# Altium PCB MUHTAS-1.PcbDoc
Units mm, origin at the board's own origin, x right, y up, seen from the top; angles counter-clockwise.
Board outline 75 x 60 mm, 2 copper layers (Top Layer, Bottom Layer); 35 components, 26 nets, 130 pads, 17 vias.
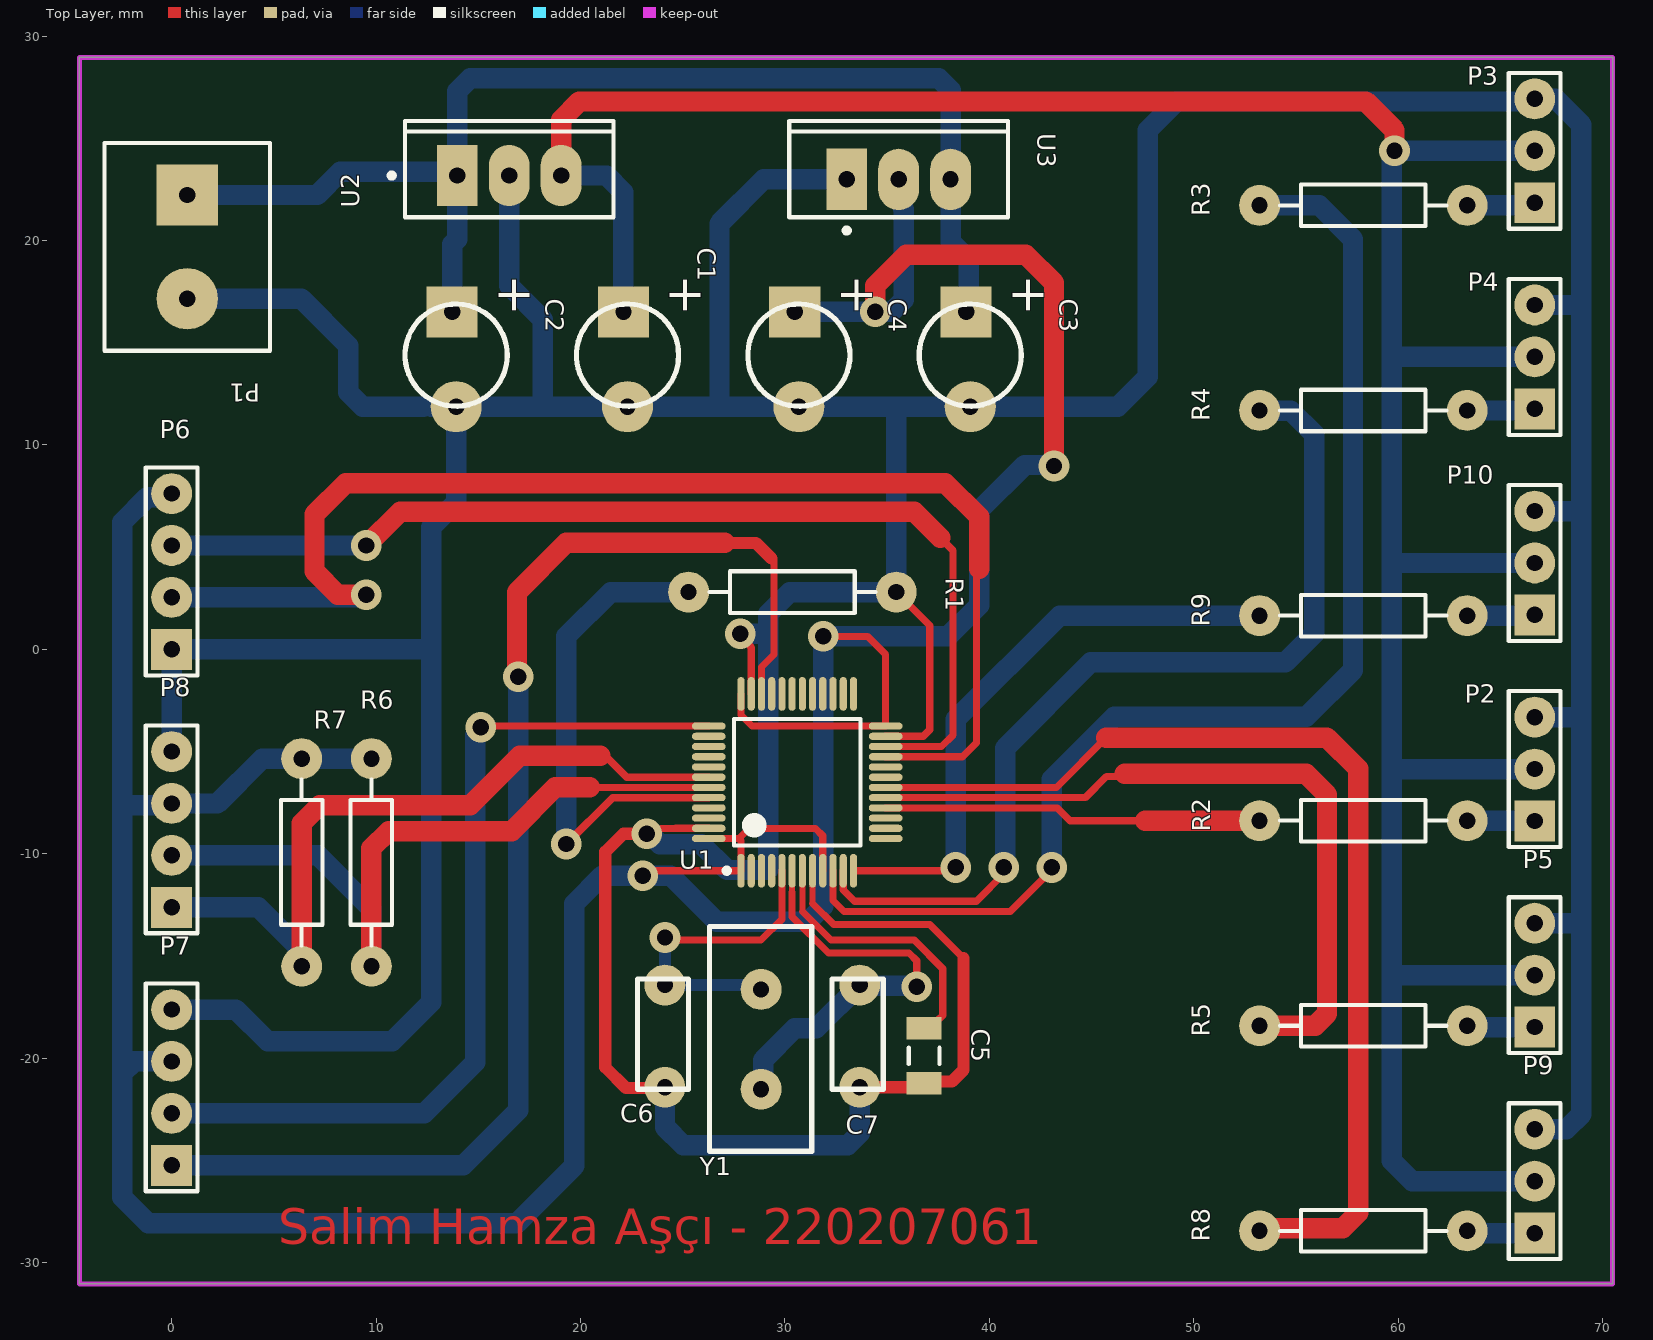
[diagram p0: Top Layer view]
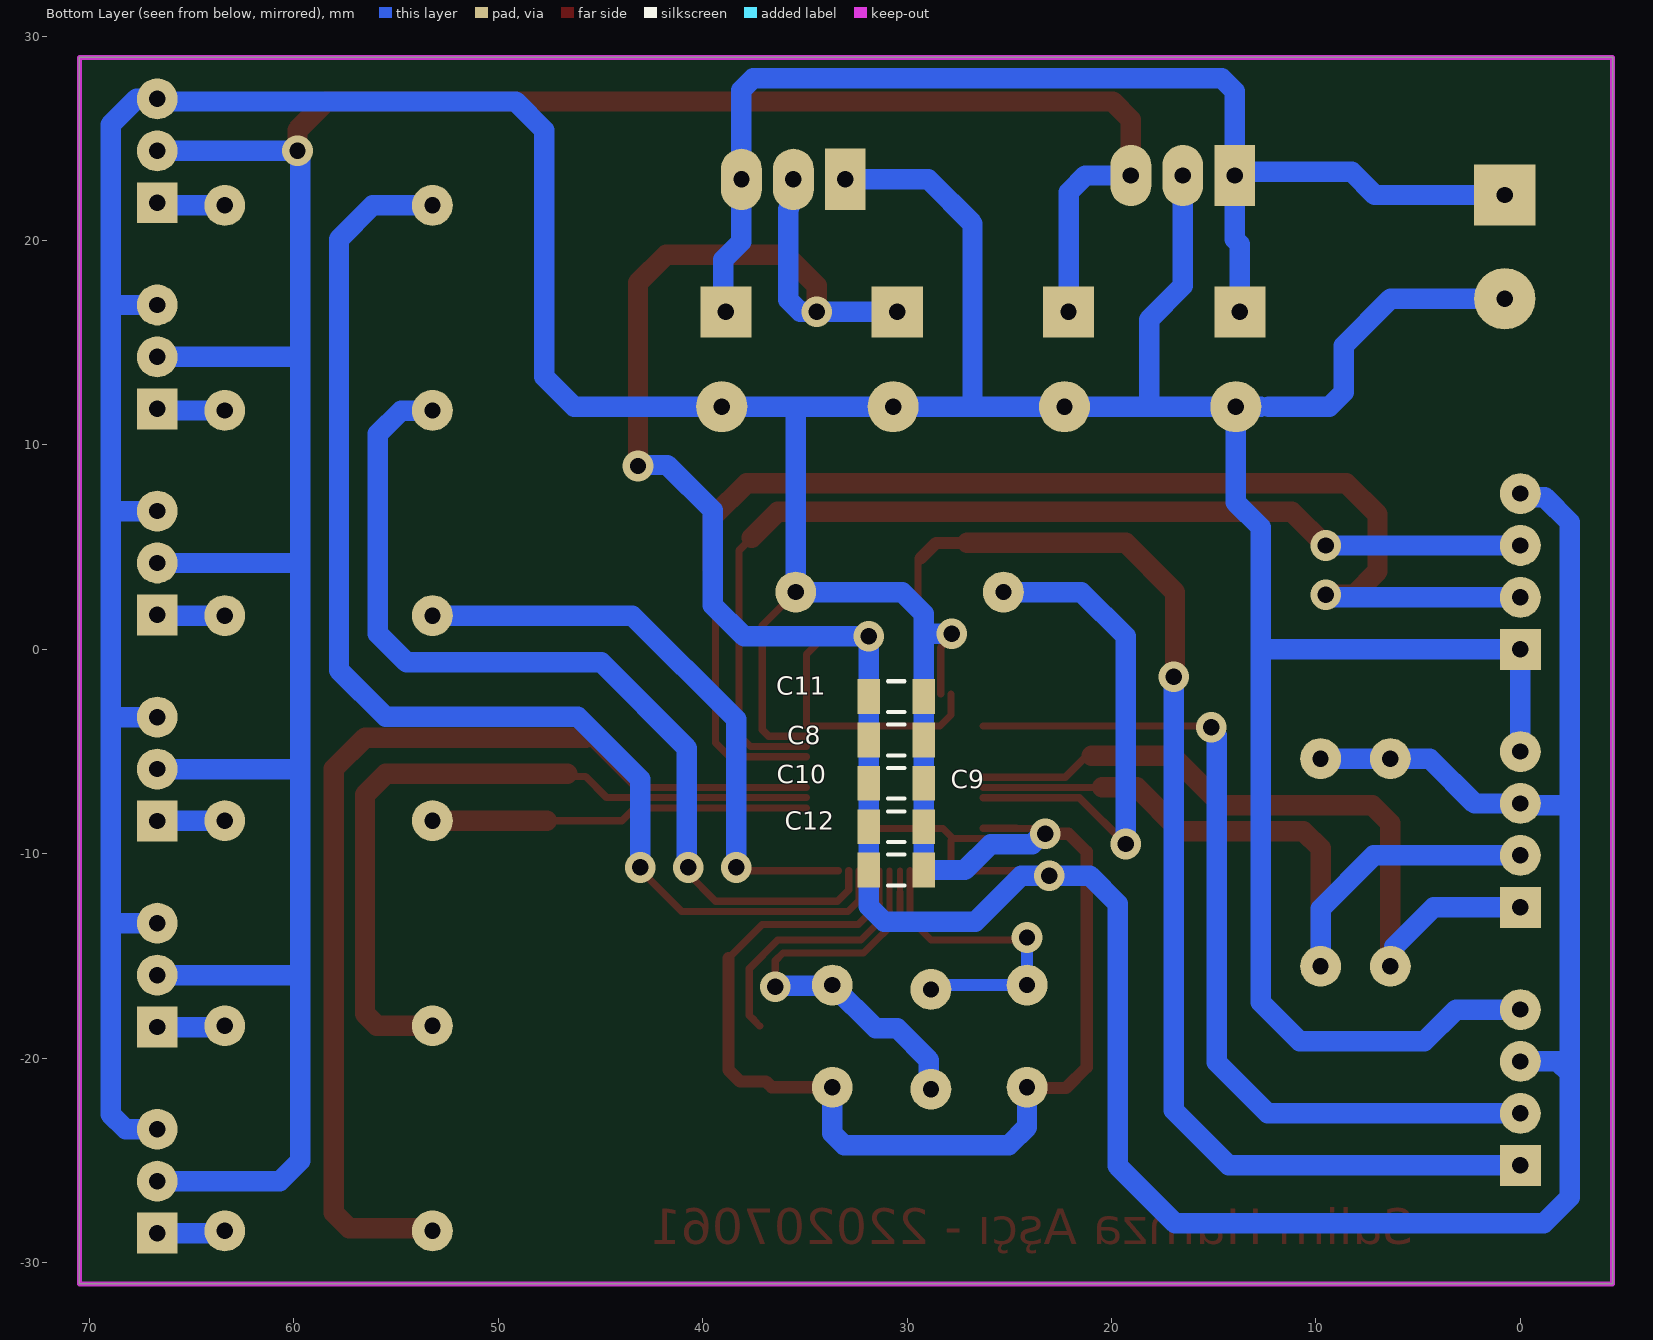
[diagram p1: Bottom Layer view, seen from below]
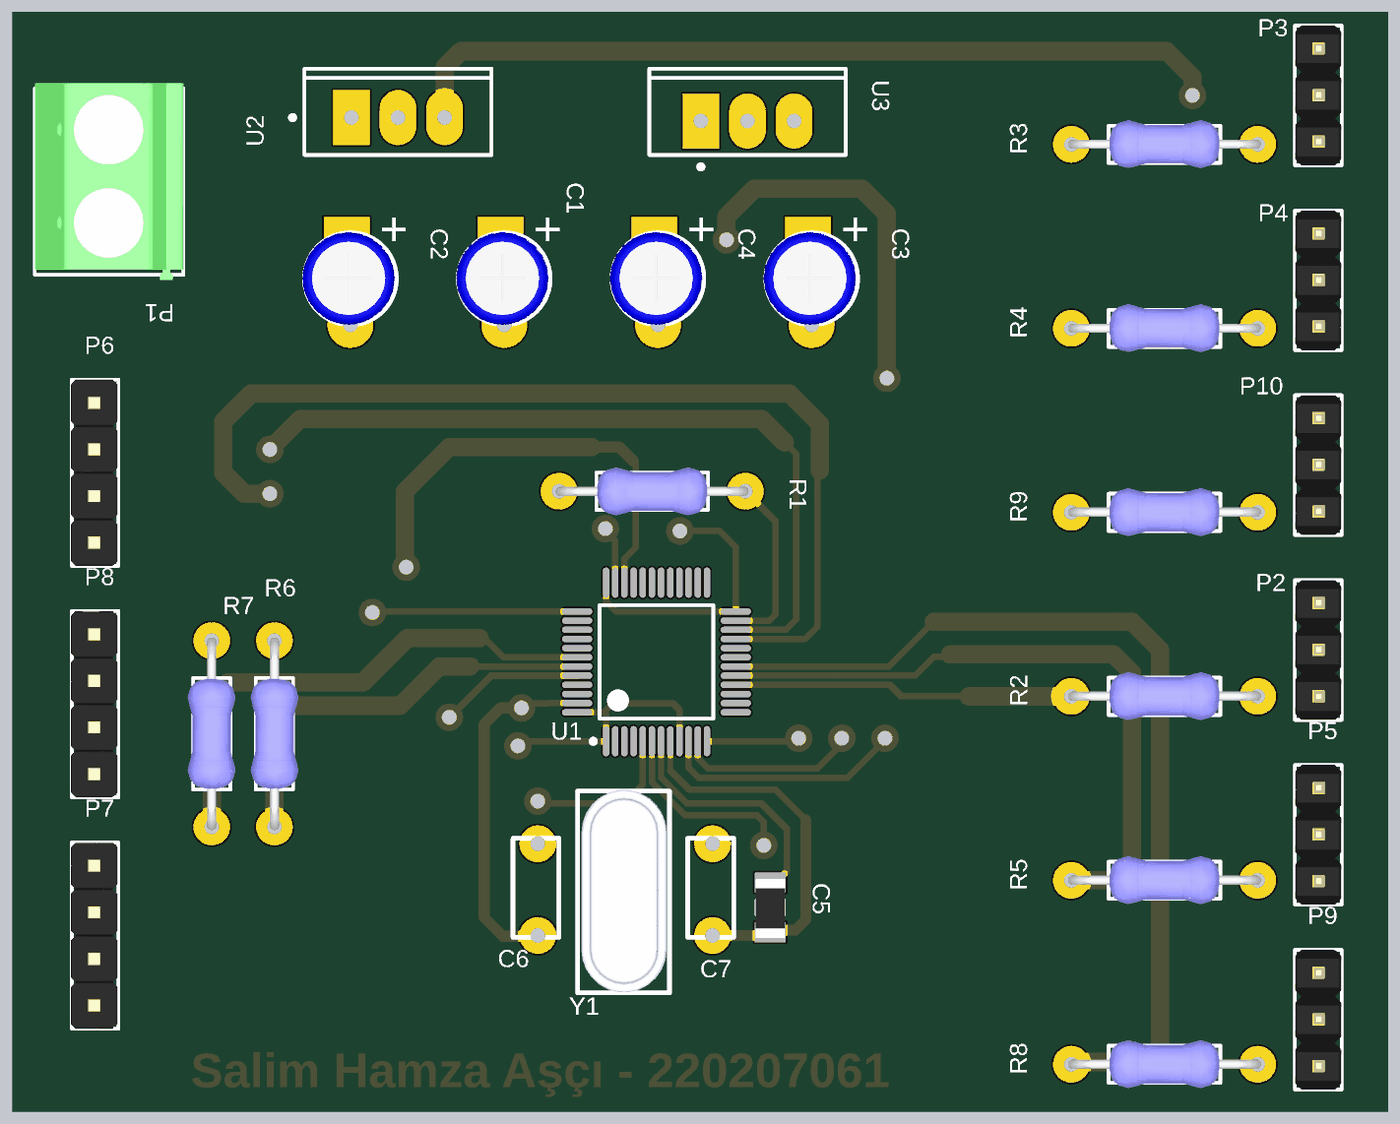
[diagram p2: 3D render of the assembled board from above, using the file's embedded part models]
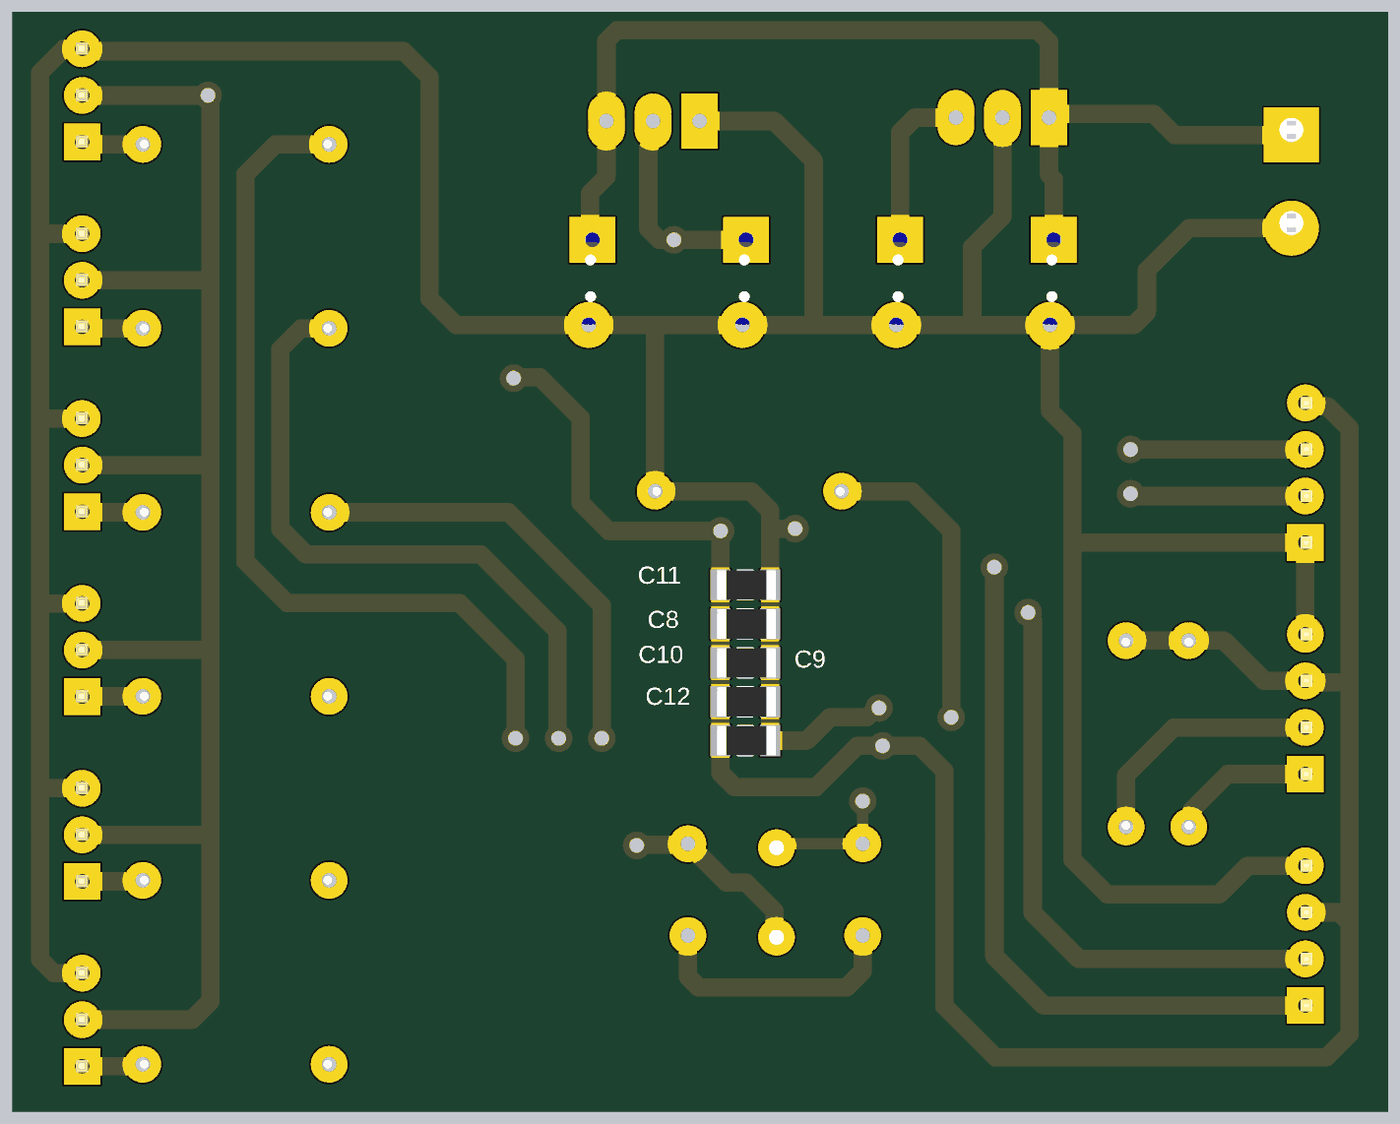
[diagram p3: 3D render of the assembled board from below, using the file's embedded part models]

## Layer stack, top to bottom
Top Solder: solder mask 0.0102, Solder Resist, Dk 3.5
Top Layer: signal copper 0.0356
Dielectric 1: dielectric 0.32, FR-4, Dk 4.8
Bottom Layer: signal copper 0.0356
Bottom Solder: solder mask 0.0102, Solder Resist, Dk 3.5

## Board outline
-4.515,-31.044 -4.515,28.956 70.485,28.956 70.485,-31.044

## Design rules (kind name [scope] priority, off if disabled: settings)
Clearance [All] p1: gap=0.1 ignorepadtopadclearanceinfootprint=FALSE
PolygonConnect [All] p1: connectstyle=Relief reliefconductorwidth=0.254 reliefentries=4 polygonreliefangle="90 Angle" airgapwidth=0.254
RoutingVias [All] p1: holewidth=0.8 width=1.5 viastyle="Through Hole" minholewidth=0.5 minwidth=1.27 maxholewidth=1 maxwidth=2
SolderMaskExpansion [All] p1: expansion=0.102 istentingtop=FALSE
Width [All] p1: maxlimit=1 minlimit=0.35 preferedwidth=0.6
30 further rules are at their usual default settings.

## Components (designator, comment, footprint, x,y, rotation, side; value= is the part's Value field where it differs from the comment)
C1 "0.22uF" cap_pich_5mm_dia_5mm 22.298,16.91 r270 top
C2 "0.22uF" cap_pich_5mm_dia_5mm 13.916,16.91 r270 top
C3 "0.22uF" cap_pich_5mm_dia_5mm 39.062,16.91 r270 top
C4 "0.22uF" cap_pich_5mm_dia_5mm 30.68,16.91 r270 top
C5 "100nF" 1206 36.703,-19.812 r270 top
C6 "22pF" mercimek 24.13,-18.923 r270 top
C7 "22pF" mercimek 33.655,-18.923 r270 top
C8 "100nF" 1206 30.607,-4.534 r180 bottom
C9 "100nF" 1206 30.607,-6.654 r180 bottom
C10 "100nF" 1206 30.607,-8.775 r180 bottom
C11 "100nF" 1206 30.607,-2.413 r180 bottom
C12 "100nF" 1206 30.607,-10.895 r180 bottom
P1 "Header 2" 5mm_Klemens 0.762,22.225 r270 top
P2 "Header 3" header_1x3 66.675,-5.856 r90 top
P3 "Header 3" header_1x3 66.675,24.384 r90 top
P4 "Header 3" header_1x3 66.675,14.304 r90 top
P5 "Header 3" header_1x3 66.675,-15.936 r90 top
P6 "Header 4" HEADER_1X4 0,0 r90 top
P7 "Debug" HEADER_1X4 0,-25.24 r90 top
P8 "Header 4" HEADER_1X4 0,-12.62 r90 top
P9 "Header 3" header_1x3 66.675,-26.016 r90 top
P10 "Header 3" header_1x3 66.675,4.224 r90 top
R1 "10K" direnc_axial_0.4 29.464,3.302 r270 top
R2 "330" direnc_axial_0.4 59.193,-8.882 r90 top
R3 "330" direnc_axial_0.4 59.193,21.217 r90 top
R4 "330" direnc_axial_0.4 59.193,11.184 r90 top
R5 "330" direnc_axial_0.4 59.193,-18.915 r90 top
R6 "4K7" direnc_axial_0.4 9.271,-11.325 r0 top
R7 "4K7" direnc_axial_0.4 6.858,-9.525 r180 top
R8 "330" direnc_axial_0.4 59.193,-28.948 r90 top
R9 "330" direnc_axial_0.4 59.193,1.151 r90 top
U1 "STM32F103C8T7TR" STM-LQFP48_M 30.6,-6.505 r90 top
U2 "LM7805ACT" FAIR-TO-220-3 16.51,23.177 r90 top
U3 "LM1117T-3.3/NOPB" NDE0003A 35.56,22.987 r0 top
Y1 "8MHz" xtal 28.829,-21.517 r90 top

## Footprints (in the part's own frame and the unit in brackets; to place one, negate y for a bottom-side part, rotate by r counter-clockwise, add the part's x,y. Pads: shape width x height; smd on the part's side, far side on the other; paste and mask are expansions set on the pad)
5mm_Klemens [mm] "THR - 5,08mm - PCB Vertical Close - 02p"
  rect 3x3 hole 0.8: 1(0,0)
  round 3 hole 0.8: 2(5.08,0)
  silkscreen extent -2.54,-4.05 7.62,4.05, body extent -2.83,-4.05 7.9,4.05, height 10.01
1206 [mm]
  rect 1.1x1.7 smd: 1(-1.275,0.1) 2(1.425,0.1)
  silkscreen extent -0.32,-0.65 0.48,0.85, body extent -1.46,-0.7 1.74,0.9, height 0.6
cap_pich_5mm_dia_5mm [mm]
  rect 2.5x2.5 hole 0.8: 1(0.4,-0.2)
  round 2.5 hole 0.8: 2(5.04,0)
  silkscreen extent 0.02,-2.5 5.02,2.5, body extent -0.03,-2.63 5.03,2.43, height 11.53
direnc_axial_0.4 [mm]
  round 2 hole 0.8: 1(0.5,5.98) 2(0.5,-4.18)
  silkscreen extent -0.52,-3.16 1.52,4.96, body extent -0.78,-4.35 1.8,6.15, height 2.87
FAIR-TO-220-3 [mm] "FM, 3-Leads, Body 10.2x4.7mm, Pitch 2.54mm"
  rect 3x2 hole 0.8: 1(0,2.54)
  oval 3x2 hole 0.8: 2(0,0) 3(0,-2.54)
  silkscreen extent -2.04,-5.1 2.66,5.87, body extent -2.04,-5.1 2.66,5.1, height 18.95
header_1x3 [mm]
  rect 2x2 hole 0.8: 1(-2.54,0)
  round 2 hole 0.8: 2(0,0) 3(2.54,0)
  silkscreen extent -3.81,-1.27 3.81,1.27, body extent -3.81,-1.27 3.81,1.27, height 9.2
HEADER_1X4 [mm]
  rect 2x2 hole 0.8: 1(0,0)
  round 2 hole 0.8: 2(2.54,0) 3(5.08,0) 4(7.62,0)
  silkscreen extent -1.27,-1.27 8.89,1.27, body extent -1.27,-1.22 8.89,1.32, height 8.79
mercimek [mm]
  round 2 hole 0.8: 1(-2.5,0) 2(2.5,0)
  silkscreen extent -2.8,-1.35 2.6,1.15, body extent -2.49,-1.4 2.2,1.1, height 5.35
NDE0003A [mm] "FM, 3-Leads, Body 10.7x4.7mm, Pitch 2.54mm"
  rect 2x3 hole 0.8: 1(-2.54,0)
  oval 2x3 hole 0.8: 2(0,0) 3(2.54,0)
  silkscreen extent -5.35,-2.62 5.35,2.85, body extent -5.4,-1.9 5.4,2.9, height 19.4
STM-LQFP48_M [mm] "QFP, 48-Leads, Body 7x7mm, Pitch 0.5mm, IPC Low Density"
  oval 1.65x0.35 smd: 1(-4.325,2.75) 2(-4.325,2.25) 3(-4.325,1.75) 4(-4.325,1.25) 5(-4.325,0.75) 6(-4.325,0.25) 7(-4.325,-0.25) 8(-4.325,-0.75) 9(-4.325,-1.25) 10(-4.325,-1.75) 11(-4.325,-2.25) 12(-4.325,-2.75) 25(4.325,-2.75) 26(4.325,-2.25) 27(4.325,-1.75) 28(4.325,-1.25) 29(4.325,-0.75) 30(4.325,-0.25) 31(4.325,0.25) 32(4.325,0.75) 33(4.325,1.25) 34(4.325,1.75) 35(4.325,2.25) 36(4.325,2.75)
  oval 0.35x1.65 smd: 13(-2.75,-4.325) 14(-2.25,-4.325) 15(-1.75,-4.325) 16(-1.25,-4.325) 17(-0.75,-4.325) 18(-0.25,-4.325) 19(0.25,-4.325) 20(0.75,-4.325) 21(1.25,-4.325) 22(1.75,-4.325) 23(2.25,-4.325) 24(2.75,-4.325) 37(2.75,4.325) 38(2.25,4.325) 39(1.75,4.325) 40(1.25,4.325) 41(0.75,4.325) 42(0.25,4.325) 43(-0.25,4.325) 44(-0.75,4.325) 45(-1.25,4.325) 46(-1.75,4.325) 47(-2.25,4.325) 48(-2.75,4.325)
  silkscreen extent -4.45,-3.1 3.1,3.57, body extent -3.5,-3.5 3.5,3.5, height 1.6
xtal [mm]
  round 2 hole 0.8: 1(0,0) 2(4.88,0)
  silkscreen extent -3.04,-2.48 7.96,2.52, body extent -3,-2.32 8.03,2.32, height 13.46

## Part data
C1 C2 C3 C4: library part Cap2, "Capacitor", PackageDescription="Capacitor; 2 Leads", PackageReference=CAPR5-4X5, Published=23-Sep-2002, Publisher="Altium Limited"
C5 C6 C7 C8 C9 C10 C11 C12: library part Cap, "Capacitor", LatestRevisionDate=17-Jul-2002, LatestRevisionNote="Re-released for DXP Platform.", PackageDescription="Radial Cap, Thru-Hole; 2 Leads; 0.3 in Pin Spacing", PackageReference=RAD-0.3, Published=8-Jun-2000, Publisher="Altium Limited"
P1: "Header, 2-Pin", LatestRevisionDate=17-Jul-2002, LatestRevisionNote="Re-released for DXP Platform.", Publisher="Altium Limited"
P2 P3 P4 P5 P9 P10: "Header, 3-Pin", LatestRevisionDate=17-Jul-2002, LatestRevisionNote="Re-released for DXP Platform.", Publisher="Altium Limited"
P6 P8: "Header, 4-Pin", LatestRevisionDate=17-Jul-2002, LatestRevisionNote="Re-released for DXP Platform.", Publisher="Altium Limited"
P7: library part "Header 4", "Header, 4-Pin", LatestRevisionDate=17-Jul-2002, LatestRevisionNote="Re-released for DXP Platform.", Publisher="Altium Limited"
R1 R2 R3 R4 R5 R6 R7 R8 R9: library part Res1, "Resistor", LatestRevisionDate=17-Jul-2002, LatestRevisionNote="Re-released for DXP Platform.", PackageDescription="Axial Device, Thru-Hole; 2 Leads; 0.3 in Pin Spacing", PackageReference=AXIAL-0.3, Published=8-Jun-2000, Publisher="Altium Limited"
U1: library part CMP-0237-00303-2, "ARM Cortex-M3 32-bit MCU, 64 KB Flash, 20 KB Internal RAM, 37 I/Os, 48-Pin LQFP, -40 to 105 degC, Tape and Reel", Manufacturer=STMicroelectronics, Operating Frequency(F) (Processor speed) (MHz)=72, Package Description="48-Pin Low Profile Quad Flat Package, Body 7 x 7 mm, Pitch 0.5 mm", Package Reference=LQFP48, Supply Voltage(Vcc) min (V)=2, I/Os (High Current)=36, ComponentLink1Description="Manufacturer URL", ComponentLink1URL=http://www.st.com/, ComponentLink2Description=Datasheet, ComponentLink2URL=http://www.st.com/st-web-ui/static/active/en/resource/technical/document/datasheet/CD00161566.pdf, Core="ARM Cortex-M3", DatasheetVersion="Rev. 17", FLASH Size (Prog) (kB)=64, Mounting Technology="Surface Mount", Packing="Tape and Reel", PartNumber=STM32F103C8T7TR, Internal RAM Size (kB)=20
U2: library part CMP-2000-04937-1, "Positive Voltage Regulator, 5 V, 1 A, 0 to 125 degC, 3-Pin TO-220, RoHS, Tube", Dropout Voltage Measurement Current=1A, Manufacturer=Fairchild, Maximum Operating Temperature=+125degC, Maximum Input Voltage=35V, Minimum Operating Temperature=0degC, Output Voltage=5V, Package Description="3-Pin Through Hole Device, Body 10 x 4.5 mm, Pitch 2.54 mm", Package Reference=TO-220, Quiescent Current=6mA, Typical Dropout Voltage @ Current=2V@1A, Datasheet URL=https://datasheet.ciiva.com/5816/1359194-5816420.pdf, Datasheet Version="Rev. 1.0.1, 05/2006", Dimensions=10.67x4.83x16.51mm, Height=16.51mm, Length=10.67mm, Line Regulation=50mV, Load Regulation=100mV, Manufacturer URL=https://www.fairchildsemi.com/, Maximum Output Current=1A, Mounting Type=ThroughHole, Number Of Outputs=1, Output Type=Fixed, Package Type=TO-220, Package URL=https://www.fairchildsemi.com/package-drawings/TO/TO220B03.pdf, Pin Count=3, Polarity=Positive, Regulator Function=Linear, Series=LM78xx, Width=4.83mm
U3: library part CMP-0062-02494-3, "800mA Low-Dropout Linear Regulator, 3-pin TO-220, Pb-Free", Manufacturer="Texas Instruments", PackageTopMarking=NSUZXYTTE#*LM1117T*3.3, PowerWise=N, ComponentLink1Description="Datasheet URL", ComponentLink1URL=http://www.ti.com/general/docs/lit/getliterature.tsp?genericPartNumber=LM1117-N&fileType=pdf, CompType="LDO IC", PackageDescription="TO-220, Molded, 3 Lead, Straight", PackageReference=NDE0003A, PinCount=3, RoHS=Y
Y1: library part XTAL, "Crystal Oscillator", LatestRevisionDate=17-Jul-2002, LatestRevisionNote="Re-released for DXP Platform.", PackageDescription="Crystal, Thru-Hole; 2 Leads; Body 3.1 x 8.2 mm (Dia.xH)", PackageReference=R38, Published=8-Jun-2000, Publisher="Altium Limited"

## Via types
v1: diameter 1.5, hole 0.8, Top Layer to Bottom Layer, 17 vias

## Nets (pads, with @x,y where several pads share a name; then routed paths per layer and width w, separated by ;. In a path a pad name is that pad's centre, name@x,y a point inside that pad or via, vN(x,y) a via of type N, cw(c..) or ccw(c..) an arc to the next point about the centre after c; other vN are vias at no path point)
+3V3: C4.1 C8.1 C9.1 C10.1 C11.1 C12.1 P6.4 P7.3 P8.3 R6.1 R7.2 U1.1 U1.9 U1.24 U1.36 U1.48 U3.2 | length 194.3
  Top Layer w0.35: v1(23.045,-11.083) 23.298,-10.83 U1.1 27.85,-9.359 27.747,-9.255 ; U1.48 27.747,-9.255 ; U1.36 27.85,-3.212 28.393,-3.755 U1.24 34.925,-0.254 34.036,0.635 v1(31.877,0.635) ; U1.9 31.85,-9.117 31.496,-8.763 28.239,-8.763 27.747,-9.255
  Top Layer w1: v1(34.417,16.51) 34.417,17.78 35.941,19.304 41.783,19.304 43.16,17.927 v1(43.16,8.965)
  Bottom Layer w1: P7.3 -1.827,-20.16 -2.413,-20.746 ; P6.4 -0.191,7.429 -1.207,7.429 -2.413,6.223 -2.413,-7.62 ; R6.1 R7.2 4.434,-5.345 2.239,-7.54 P8.3 -0.08,-7.62 -2.413,-7.62 ; C4.1 v1(34.417,16.51) 35.228,16.51 35.814,17.096 35.814,21.526 35.751,21.589 35.751,22.796 U3.2 ; v1(43.16,8.965) 43.16,8.997 43.18,9.017 41.719,9.017 39.497,6.794 39.497,2.159 37.973,0.635 v1(31.877,0.635) 31.882,0.63 C11.1 C8.1 C9.1 C10.1 C12.1 31.877,-10.8 31.877,-12.573 31.115,-13.335 26.67,-13.335 24.418,-11.083 v1(23.045,-11.083) 21.048,-11.083 19.685,-12.446 19.685,-25.273 16.891,-28.067 -1.143,-28.067 -2.413,-26.797 -2.413,-20.746 ; -2.413,-20.746 -2.413,-7.62
+5V: C1.1 P2.2 P3.2 P4.2 P5.2 P9.2 P10.2 U2.3 | length 146.7
  Top Layer w1: U2.3 19.05,25.908 19.939,26.797 58.42,26.797 59.815,25.402 59.815,24.386 v1(59.817,24.384)
  Bottom Layer w1: U2.3 21.273,23.177 22.098,22.352 C1.1 ; v1@59.69,24.384 P3.2 ; v1(59.817,24.384) 59.765,24.332 59.765,24.141 59.69,24.066 59.69,14.351 ; P9.2 60.687,-26.016 59.69,-25.019 59.69,-15.748 ; P5.2 59.878,-15.936 59.69,-15.748 ; P2.2 59.803,-5.856 59.69,-5.969 ; P10.2 59.911,4.224 59.69,4.445 ; P4.2 59.737,14.304 59.69,14.351 ; 59.69,-15.748 59.69,-5.969 ; 59.69,-5.969 59.69,4.445 ; 59.69,4.445 59.69,14.351
+9V: C2.1 C3.1 P1.1 U2.1 U3.3 | length 60.6
  Bottom Layer w1: P1.1 7.112,22.225 8.255,23.368 13.779,23.368 U2.1 ; C2.1 13.716,19.812 13.97,20.066 U2.1 ; C3.1 38.989,16.637 38.989,19.05 38.1,19.939 U3.3 38.1,27.354 37.514,27.94 14.605,27.94 13.97,27.305 U2.1
GND: C1.2 C2.2 C3.2 C4.2 C5.2 C6.2 C7.2 C8.2 C9.2 C10.2 C11.2 C12.2 P1.2 P2.3 P3.3 P4.3 P5.3 P6.1 P7.4 P8.4 P9.3 P10.3 R1.1 U1.8 U1.23 U1.35 U1.47 U2.2 U3.1 | length 338.6
  Top Layer w0.3: 31.35,-12.427 U1.8
  Top Layer w0.35: v1(23.241,-9.017) 23.417,-8.841 23.828,-8.841 23.906,-8.763 24.638,-8.763 24.646,-8.755 U1.47 ; v1(27.813,0.762) 27.813,0.634 28.35,0.097 U1.35 ; 31.35,-12.427 32.385,-13.462 37.084,-13.462 38.735,-15.113 ; U1.23 36.766,-4.255 37.084,-3.937 37.084,1.162 R1.1
  Top Layer w0.6: v1(23.241,-9.017) 22.098,-9.017 21.209,-9.906 21.209,-20.447 22.225,-21.463 24.09,-21.463 C6.2 ; C7.2 36.617,-21.423 C5.2 36.905,-21.135 38.174,-21.135 38.735,-20.574 38.735,-15.113
  Bottom Layer w1: P7.4 3.142,-17.62 4.699,-19.177 10.795,-19.177 12.7,-17.272 12.7,5.969 13.916,7.185 C2.2 ; P8.4 P6.1 12.138,0 ; P1.2 6.35,17.145 8.636,14.859 8.636,12.573 9.339,11.87 12.319,11.87 ; C2.2@12.7,11.87 C2.2 ; U2.2 16.51,17.78 18.161,16.129 18.161,11.87 ; v1(23.241,-9.017) 23.376,-9.017 23.884,-9.525 25.908,-9.525 27.178,-10.795 C12.2 C10.2 C9.2 C8.2 C11.2 29.182,0.889 ; C6.2 24.13,-23.368 25.019,-24.257 33.069,-24.257 33.655,-23.671 C7.2 ; v1(27.813,0.762) 29.055,0.762 29.182,0.889 ; U3.1 28.956,22.987 26.797,20.828 26.797,11.87 ; P9.3 68.218,-23.476 68.961,-22.733 68.961,-13.462 ; P5.3 68.895,-13.396 68.961,-13.462 ; P2.3 68.848,-3.316 68.961,-3.429 ; P10.3 68.801,6.764 68.961,6.604 ; P4.3 68.881,16.844 68.961,16.764 ; C2.2 18.161,11.87 ; 18.161,11.87 C1.2 26.797,11.87 ; 26.797,11.87 C4.2 35.306,11.87 ; 29.182,0.889 29.182,1.75 30.234,2.802 R1.1 35.444,11.732 35.306,11.87 ; 35.306,11.87 C3.2 46.287,11.87 47.752,13.335 47.752,25.4 49.149,26.797 66.548,26.797 P3.3 67.691,26.924 68.961,25.654 68.961,16.764 ; 68.961,-13.462 68.961,-3.429 ; 68.961,-3.429 68.961,6.604 ; 68.961,6.604 68.961,16.764
NetC5_1: C5.1 U1.7 | length 13
  Top Layer w0.3: 30.85,-12.827 U1.7
  Top Layer w0.35: 30.85,-12.827 32.247,-14.224 36.322,-14.224 37.719,-15.621 37.719,-17.907 37.478,-18.148 37.478,-18.162 37.218,-18.422 C5.1@37.204,-18.422
NetC6_1: C6.1 U1.5 Y1.2 | length 15.7
  Top Layer w0.35: v1(24.13,-14.097) 24.257,-14.224 28.829,-14.224 29.85,-13.203 U1.5
  Bottom Layer w0.6: v1(24.13,-14.097) C6.1 28.615,-16.423 Y1.2
NetC7_1: C7.1 U1.6 Y1.1 | length 21.1
  Top Layer w0.3: 30.35,-11.882 U1.6
  Top Layer w0.35: 30.35,-11.882 30.35,-13.078 32.131,-14.859 36.068,-14.859 36.444,-15.235 36.444,-16.505 v1(36.449,-16.51)
  Bottom Layer w1: Y1.1 28.935,-21.411 28.935,-20.087 30.48,-18.542 31.536,-18.542 C7.1 33.699,-16.466 36.405,-16.466 v1(36.449,-16.51)
NetP2_1: P2.1 R2.2 | length 3.3
  Bottom Layer w1: R2.2 P2.1@66.661,-8.382 ; P2.1 P2.1@66.661,-8.382 ; P2.1@66.675,-8.382 P2.1@66.661,-8.382
NetP3_1: P3.1 R3.2 | length 3.4
  Bottom Layer w1: R3.2 66.548,21.717 P3.1
NetP4_1: P4.1 R4.2 | length 3.3
  Bottom Layer w1: R4.2 66.595,11.684 P4.1
NetP5_1: P5.1 R5.2 | length 3.3
  Bottom Layer w1: R5.2 63.434,-18.476 P5.1
NetP9_1: P9.1 R8.2 | length 3.3
  Bottom Layer w1: R8.2 63.481,-28.556 P9.1
NetP10_1: P10.1 R9.2 | length 3.3
  Bottom Layer w1: R9.2 P10.1@66.642,1.651 ; P10.1@66.659,1.651 P10.1@66.642,1.651 ; P10.1 P10.1@66.642,1.651
NetR1_2: R1.2 U1.44 | length 24.9
  Top Layer w0.381: v1(19.304,-9.525) 21.574,-7.255 U1.44
  Bottom Layer w1: v1(19.304,-9.525) 19.304,0.635 21.471,2.802 R1.2
PWM1: R3.1 U1.10 | length 60.9
  Top Layer w0.35: U1.10 32.35,-12.284 32.893,-12.827 41.021,-12.827 43.053,-10.795 v1@43.053,-10.414
  Bottom Layer w1: v1@43.053,-10.414 43.053,-6.35 46.101,-3.302 55.499,-3.302 57.785,-1.016 57.785,20.066 56.134,21.717 R3.1
  other v1: 43.053,-10.668
PWM2: R4.1 U1.11 | length 46.1
  Top Layer w0.35: U1.11 32.85,-11.768 33.401,-12.319 39.37,-12.319 40.767,-10.922 v1@40.767,-10.668
  Bottom Layer w1: v1@40.767,-10.668 40.767,-4.826 44.958,-0.635 54.483,-0.635 55.88,0.762 55.88,10.541 54.743,11.678 53.219,11.678 R4.1
  other v1: 40.703,-10.668
PWM3: R9.1 U1.12 | length 29.1
  Top Layer w0.35: U1.12 38.192,-10.83 v1(38.354,-10.668)
  Bottom Layer w1: v1@38.354,-10.541 38.354,-3.429 43.434,1.651 R9.1
PWM4: R2.1 U1.16 | length 18.5
  Top Layer w0.35: U1.16 43.315,-7.755 43.942,-8.382 46.355,-8.382 47.625,-8.382
  Top Layer w1: 47.625,-8.382 R2.1
PWM5: R5.1 U1.17 | length 38.2
  Top Layer w0.35: U1.17 44.688,-7.255 45.72,-6.223 48.133,-6.223
  Top Layer w1: 46.609,-6.096 55.499,-6.096 56.515,-7.112 56.515,-17.829 55.929,-18.415 R5.1
PWM6: R8.1 U1.18 | length 51.7
  Top Layer w0.35: U1.18 43.283,-6.755 45.72,-4.318
  Top Layer w1: 45.72,-4.318 56.515,-4.318 58.039,-5.842 58.039,-27.559 57.277,-28.321 53.34,-28.321 R8.1
RX: P6.3 U1.22 | length 52.3
  Top Layer w0.35: U1.22 37.663,-4.755 38.227,-4.191 38.227,4.826 37.592,5.461
  Top Layer w1: v1(9.525,5.08) 11.176,6.731 36.322,6.731 37.592,5.461
  Bottom Layer w1: P6.3 v1(9.525,5.08)
SCL: P8.1 R7.1 U1.42 | length 36.5
  Top Layer w0.35: 21.209,-5.207 22.257,-6.255 U1.42
  Top Layer w1: R7.1 6.358,-8.501 7.239,-7.62 14.605,-7.62 17.018,-5.207 20.955,-5.207
  Bottom Layer w1: P8.1 4.238,-12.62 6.167,-14.549 6.167,-15.314 R7.1
SDA: P8.2 R6.2 U1.43 | length 37.2
  Top Layer w0.35: 20.447,-6.755 U1.43
  Top Layer w1: R6.2 9.771,-9.738 10.619,-8.89 16.637,-8.89 18.772,-6.755 20.447,-6.755
  Bottom Layer w1: P8.2 7.159,-10.08 9.771,-12.692 R6.2
SWCLK: P7.2 U1.37 | length 43.6
  Top Layer w0.35: v1(15.113,-3.81) 15.168,-3.755 U1.37
  Bottom Layer w1: P7.2 12.352,-22.7 14.859,-20.193 14.859,-4.199 15.113,-3.945 v1(15.113,-3.81)
SWDIO: P7.1 U1.34 | length 64.2
  Top Layer w0.35: U1.34 28.85,-0.868 29.464,-0.254 29.464,4.318 29.337,4.445
  Top Layer w0.6: 27.051,5.207 28.575,5.207 29.337,4.445
  Top Layer w1: v1(16.955,-1.341) 16.947,-1.341 16.891,-1.397 16.891,2.794 19.304,5.207 27.051,5.207
  Bottom Layer w1: P7.1 14.257,-25.24 16.955,-22.542 v1(16.955,-1.341)
TX: P6.2 U1.21 | length 64.7
  Top Layer w0.35: U1.21 38.687,-5.255 39.37,-4.572 39.37,3.683
  Top Layer w1: v1(9.525,2.667) 8.128,2.667 6.985,3.81 6.985,6.604 8.509,8.128 37.846,8.128 39.497,6.477 39.497,3.937
  Bottom Layer w1: P6.2 9.398,2.54 v1(9.525,2.667)
pads on no net: U1.2 U1.3 U1.4 U1.13 U1.14 U1.15 U1.19 U1.20 U1.25 U1.26 U1.27 U1.28 U1.29 U1.30 U1.31 U1.32 U1.33 U1.38 U1.39 U1.40 U1.41 U1.45 U1.46

## Keep-outs
Keep-Out Layer:
  the board outline again, w0.254

## Other copper
Top Layer:
  text "Salim Hamza Aşçı - 220207061" at 5.207,-29.693 h3

## Text inside footprints (layer, text, board x,y; h text height)
C1: Top Overlay "+" at 23.787,16.31 h3 r270
C2: Top Overlay "+" at 15.405,16.31 h3 r270
C3: Top Overlay "+" at 40.551,16.31 h3 r270
C4: Top Overlay "+" at 32.169,16.31 h3 r270